# Altium PCB AD8349.PcbDoc
Units mm, origin at the board's own origin, x right, y up, seen from the top; angles counter-clockwise.
Board outline 94.9 x 39.9 mm, 2 copper layers (Top Layer, Bottom Layer); 31 components, 20 nets, 95 pads, 155 vias.
Unrouted connection lines stored in the file: 47.
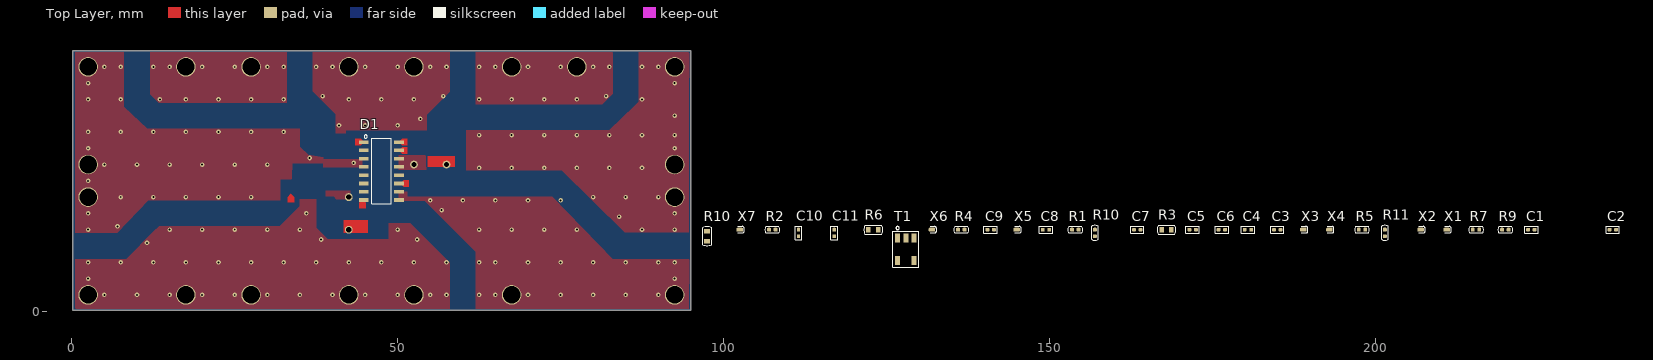
[diagram p0: Top Layer view]
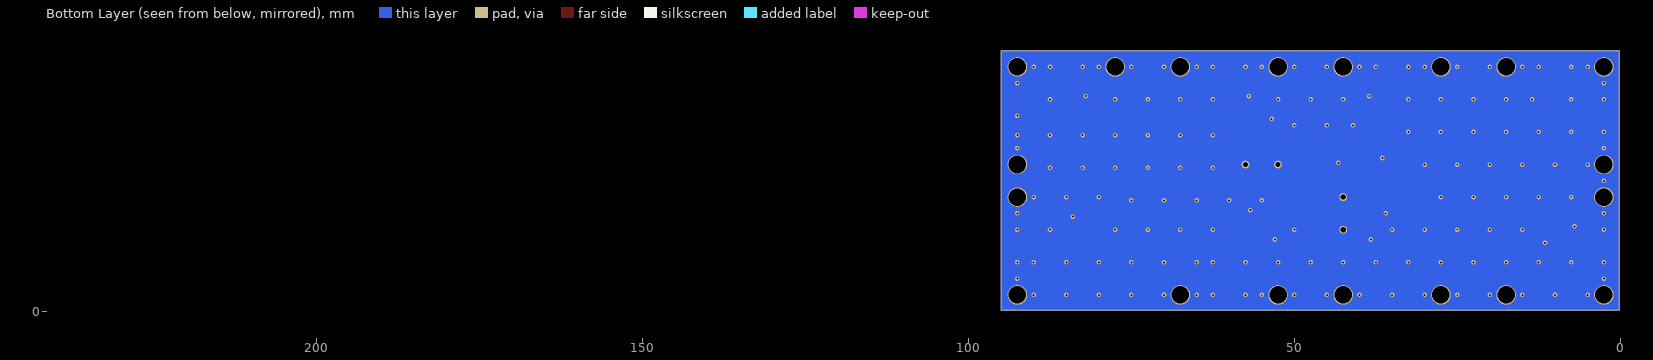
[diagram p1: Bottom Layer view, seen from below]

## Layer stack, top to bottom
Top Solder: solder mask 0.0102, Solder Resist, Dk 3.5
Top Layer: signal copper 0.0356
Dielectric 1: dielectric 0.32, FR-4, Dk 4.8
Bottom Layer: signal copper 0.0356
Bottom Solder: solder mask 0.0102, Solder Resist, Dk 3.5

## Board outline
0.1,0.1 95,0.1 95,40 0.1,40

## Design rules (kind name [scope] priority, off if disabled: settings)
Clearance [All] p1: gap=0.254 ignorepadtopadclearanceinfootprint=FALSE except(0: Arc-Hole Track-Hole SMDPad-Hole THPad-Hole Via-Hole Fill-Hole Poly-Hole Region-Hole Text-Hole)
PolygonConnect [All] p1: connectstyle=Direct reliefconductorwidth=0.254 reliefentries=4 polygonreliefangle="90 Angle" airgapwidth=0.254
RoutingVias [All] p1: holewidth=0.711 width=1.27 viastyle="Through Hole" minholewidth=0.711 minwidth=1.27 maxholewidth=0.711 maxwidth=1.27
SolderMaskExpansion [All] p1: expansion=0.102 istentingtop=FALSE
Width [All] p1: maxlimit=0.254 minlimit=0.254 preferedwidth=0.254
30 further rules are at their usual default settings.

## Components (designator, comment, footprint, x,y, rotation, side; value= is the part's Value field where it differs from the comment)
C1 "100" CAPC1005L 223.999,12.5 r0 top
C2 "100" CAPC1005L 236.499,12.5 r0 top
C3 "100" CAPC1005L 185,12.5 r0 top
C4 "100" CAPC1005L 180.5,12.5 r0 top
C5 "1000" CAPC1005L 172,12.5 r0 top
C6 "0,1 мк" CAPC1005L 176.5,12.5 r0 top
C7 "1000" CAPC1005L 163.5,12.5 r0 top
C8 "1000" CAPC1005L 149.5,12.5 r0 top
C9 "1000" CAPC1005L 141,12.5 r0 top
C10 "0,1 мк" CAPC1005L 111.5,12 r90 top
C11 "1000" CAPC1005L 117,12 r90 top
D1 "AD8349" SOIC127P600X175-16N 47.5,21.5 r0 top
R1 "0" RESC1005L 154,12.5 r0 top
R2 "0" RESC1005L 107.5,12.5 r0 top value="10 к"
R3 "0" RESC1608L 168,12.5 r0 top value=200
R4 "0" RESC1005L 136.5,12.5 r0 top value=200
R5 "200" RESC1005L 198,12.5 r0 top value=0
R6 "0" RESC1608L 123,12.5 r0 top
R7 "0" RESC1005L 215.5,12.5 r0 top
R9 "0" RESC1005L 219.999,12.5 r0 top
R10 "0" RESC1005L 157,12 r90 top
R10 "49,9" RESC1608L 97.5,11.5 r90 top
R11 "0" RESC1005L 201.5,12 r90 top
T1 "ETC1-1-13TR" TRANS_ETC1-1-13TR 128,9.5 r0 top
X1 "СРГ-50-751ФВ" TP0.6X1 211,12.5 r0 top
X2 "СРГ-50-751ФВ" TP0.6X1 207,12.5 r0 top
X3 "СРГ-50-751ФВ" TP0.6X1 189,12.5 r0 top
X4 "СРГ-50-751ФВ" TP0.6X1 193,12.5 r0 top
X5 "СРГ-50-751ФВ" TP0.6X1 145,12.5 r0 top
X6 "СРГ-50-751ФВ" TP0.6X1 132,12.5 r0 top
X7 "СРГ-50-751ФВ" TP0.6X1 102.5,12.5 r0 top

## Footprints (in the part's own frame and the unit in brackets; to place one, negate y for a bottom-side part, rotate by r counter-clockwise, add the part's x,y. Pads: shape width x height; smd on the part's side, far side on the other; paste and mask are expansions set on the pad)
CAPC1005L [mm] "Chip Capacitor, Body 1.0x0.5mm, IPC High Density"
  rrect50% 0.6x0.5 smd: 1(-0.5,0) 2(0.5,0)
  Top Layer pour cut-out: -0.2,0.5 -0.2,-0.5 0.2,-0.5 0.2,0.5
  silkscreen extent -1.02,-0.51 1.02,0.51, body extent -0.55,-0.3 0.55,0.3, height 0.6
RESC1005L [mm] "Chip Resistor, Body 1.1x0.5mm, IPC High Density"
  rrect50% 0.6x0.6 smd: 1(-0.5,0) 2(0.5,0)
  Top Layer pour cut-out: -0.2,0.5 -0.2,-0.5 0.2,-0.5 0.2,0.5
  silkscreen extent -1.15,-0.5 1.15,0.5, body extent -0.55,-0.3 0.55,0.3, height 0.4
RESC1608L [mm] "Chip Resistor, Body 1.6x0.8mm, IPC High Density"
  rect 0.7x0.9 smd: 1(-0.75,0) 2(0.75,0)
  Top Layer pour cut-out: -0.4,0.7 -0.4,-0.7 0.4,-0.7 0.4,0.7
  silkscreen extent -1.45,-0.7 1.45,0.7, body extent -0.85,-0.48 0.85,0.48, height 0.6
SOIC127P600X175-16N [mm] "SOIC, 16-Leads, Body 10,0x4,0mm (max), Pitch 1,27mm, IPC Medium Density"
  rect 1.5x0.55 smd: 1(-2.7,4.445) 2(-2.7,3.175) 3(-2.7,1.905) 4(-2.7,0.635) 5(-2.7,-0.635) 6(-2.7,-1.905) 7(-2.7,-3.175) 8(-2.7,-4.445) 9(2.7,-4.445) 10(2.7,-3.175) 11(2.7,-1.905) 12(2.7,-0.635) 13(2.7,0.635) 14(2.7,1.905) 15(2.7,3.175) 16(2.7,4.445)
  silkscreen extent -2.65,-5 1.5,5.54, body extent -3,-4.95 3,4.95, height 1.54
TP0.6X1 [mm] "Точка пайки переход СРГ-50-751 (плата заштифтована)"
  rrect50% 1x0.6 smd paste-25.4: 1(0,0)
  silkscreen extent -0.3,-0.5 0.7,0.5
TRANS_ETC1-1-13TR [mil] "Surface Mount transformer, 3.8x3.8x2.8"
  rect 30x55 smd: 1(-50,67.5) 2(0,67.5) 3(50,67.5) 4(50,-67.5) 5(-50,-67.5)
  silkscreen extent -79,-108 79,138, body extent -75,-95 75,95, height 112

## Part data
C1 C2 C3 C4: library part i6124B5A087471000001, "Чип-конденсатор", ManufacturerPartNumber="0402 NP0 100 пФ ±5 % 50 В", Power/Voltage="50 В", Tolerance="±5 %", ImKey=i6124B5A087471000001, Name=0402, PCADLibrary=PASSIV.LIB, PCADPattern=C0402, PCADSymbol=C, PCADType=C0402, TKE/TKC={TKE/TKC}, Type=Конденсатор
C5 C7 C8 C9 C11: library part i6124B5A08727A000007, "Чип-конденсатор", ManufacturerPartNumber="0402 C0G 1000 пФ ±5 % 50 В", Power/Voltage="50 В", Tolerance="±5 %", ImKey=i6124B5A08727A000007, Name=0402, PCADLibrary=PASSIV.LIB, PCADPattern=C0402, PCADSymbol=C, PCADType=C0402, Rem="Использовать диэлектрик NP0", TKE/TKC={TKE/TKC}, Type=Конденсатор
C6 C10: library part i6124B5A087044000001, "Чип-конденсатор", ManufacturerPartNumber="0402 X5R 0,1 мкФ ±10 % 10 В", Power/Voltage="10 В", Tolerance="±10 %", ImKey=i6124B5A087044000001, Name=0402, PCADLibrary=PASSIV.LIB, PCADPattern=C0402, PCADSymbol=C, PCADType=C0402, TKE/TKC={TKE/TKC}, Type=Конденсатор
D1: "WIDEBAND DIRECT QUADRATURE MODULATOR, 100 - 6000 MHz", Manufacturer=Hittite, Package=LP4E, ManufacturerPartNumber=AD8349, SymAuthor="Чернова Ю.Г.", Type=Микросхема
R1 R5 R6 R7 R9 R10 R11: library part i6124B5A0876CB00001A, "Чип-резистор", ManufacturerPartNumber="CR0402-J/-000GLF Bourns", Tolerance={Tolerance}, ImKey=i6124B5A0876CB00001A, Name=0402, PCADLibrary=PASSIV.LIB, PCADPattern=R0402, PCADSymbol=R, PCADType=R0402, Type=Резистор
R2: library part i6124B5A0876CB000018, "Чип-резистор", ManufacturerPartNumber="CR0402-JW-103GLF Bourns", Tolerance="±5 %", ImKey=i6124B5A0876CB000018, Name=0402, PCADLibrary=PASSIV.LIB, PCADPattern=R0402, PCADSymbol=R, PCADType=R0402, Type=Резистор
R3 R4: library part i6124B5A0876CB000017, "Чип-резистор", ManufacturerPartNumber="CR0402-JW-201GLF Bourns", Tolerance="±5 %", ImKey=i6124B5A0876CB000017, Name=0402, PCADLibrary=PASSIV.LIB, PCADPattern=R0402, PCADSymbol=R, PCADType=R0402, Type=Резистор
R10: library part i6124B5A08741A00000E, "Чип-резистор", ManufacturerPartNumber="Р1-12-0,1-49,9 Ом ±1 % - Т", Power/Voltage="0,1 Вт", Tolerance="±1 %", ImKey=i6124B5A08741A00000E, Name=0603, TU/GOST="АЛЯР.434110.005 ТУ", Type=Резистор
T1: "Трансформатор", Manufacturer*=Mini-Circuits, Package=SM-22, Power/Voltage*=0.25Вт, ManufacturerPartNumber=ETC1-1-13TR, Type=Трансформатор
X1 X2 X3 X4 X5 X6 X7: "Переход", ManufacturerPartNumber=СРГ-50-751ФВ, TU/GOST="ВР0.364.049 ТУ", Type=Переход

## Free pads (board coordinates)
  round 3 hole 2.7: 1(2.5,2.5) 1(2.5,17.5) 1(2.5,22.5) 1(2.5,37.5) 1(17.5,2.5) 1(17.5,37.5) 1(27.5,2.5) 1(27.5,37.5) 1(42.5,2.5) 1(42.5,37.5) 1(52.5,2.5) 1(52.5,37.5) 1(67.5,2.5) 1(67.5,37.5) 1(77.5,37.5) 1(92.5,2.5) 1(92.5,17.5) 1(92.5,22.5) 1(92.5,37.5)
  round 1.2 hole 0.8: 1(42.5,12.5) 1(42.5,17.5) 1(52.5,22.5) 1(57.5,22.5)

## Via types
v1: diameter 0.7, hole 0.3, Top Layer to Bottom Layer, 155 vias

## Nets (pads, with @x,y where several pads share a name; then routed paths per layer and width w, separated by ;. In a path a pad name is that pad's centre, name@x,y a point inside that pad or via, vN(x,y) a via of type N, cw(c..) or ccw(c..) an arc to the next point about the centre after c; other vN are vias at no path point)
GND: C1.2 C2.2 C3.1 C4.1 C5.2 C6.2 C10.1 C11.1 D1.3 D1.4 D1.9 D1.10 D1.13 D1.14 pad.1@2.5,2.5 pad.1@2.5,17.5 pad.1@2.5,22.5 pad.1@2.5,37.5 pad.1@17.5,2.5 pad.1@17.5,37.5 pad.1@27.5,2.5 pad.1@27.5,37.5 pad.1@42.5,2.5 pad.1@42.5,17.5 pad.1@42.5,37.5 pad.1@52.5,2.5 pad.1@52.5,22.5 pad.1@52.5,37.5 pad.1@67.5,2.5 pad.1@67.5,37.5 pad.1@77.5,37.5 pad.1@92.5,2.5 pad.1@92.5,17.5 pad.1@92.5,22.5 pad.1@92.5,37.5 R1.2 R3.1 R4.1 T1.3
  other v1: 5,2.5 10,2.5 15,2.5 20,2.5 25,2.5 30,2.5 35,2.5 40,2.5 45,2.5 50,2.5 55,2.5 57.5,2.5 62.5,2.5 65,2.5 70,2.5 75,2.5 80,2.5 85,2.5 90,2.5 2.5,5 92.5,5 2.5,7.5 7.5,7.5 12.5,7.5 17.5,7.5 22.5,7.5 27.5,7.5 32.5,7.5 37.5,7.5 42.5,7.5 47.5,7.5 52.5,7.5 57.5,7.5 62.5,7.5 65,7.5 70,7.5 75,7.5 80,7.5 85,7.5 90,7.5 92.5,7.5 11.536,10.464 38.25,11 38.25,11 53,11 2.5,12.5 15,12.5 20,12.5 25,12.5 30,12.5 35,12.5 50,12.5 62.5,12.5 67.5,12.5 72.5,12.5 77.5,12.5 87.5,12.5 92.5,12.5 7,13 84,14.5 2.5,15 36,15 92.5,15 56.75,15.5 55,17 60,17 65,17 70,17 75,17 7.5,17.5 12.5,17.5 17.5,17.5 22.5,17.5 27.5,17.5 80,17.5 85,17.5 90,17.5 2.5,20 62.5,22 67.5,22 72.5,22 77.5,22 82.5,22 87.5,22 5,22.5 10,22.5 15,22.5 20,22.5 25,22.5 30,22.5 43.25,22.75 36.5,23.5 2.5,25 92.5,25 62.5,27 67.5,27 72.5,27 77.5,27 82.5,27 87.5,27 92.5,27 2.5,27.5 7.5,27.5 12.5,27.5 17.5,27.5 22.5,27.5 27.5,27.5 32.5,27.5 41,28.5 45,28.5 50,28.5 53.5,29.5 92.5,30 2.5,32.5 7.5,32.5 13.5,32.5 17.5,32.5 22.5,32.5 27.5,32.5 32.5,32.5 42.5,32.5 47.5,32.5 52.5,32.5 62.5,32.5 67.5,32.5 72.5,32.5 77.5,32.5 87.5,32.5 38.5,33 57,33 82,33 2.5,35 92.5,35 5,37.5 7.5,37.5 12.5,37.5 15,37.5 20,37.5 25,37.5 30,37.5 32.5,37.5 37.5,37.5 40,37.5 45,37.5 50,37.5 55,37.5 57.5,37.5 62.5,37.5 65,37.5 70,37.5 75,37.5 80,37.5 82.5,37.5 87.5,37.5 90,37.5
NetC1_1: C1.1 D1.1 R7.2
NetC2_1: C2.1 D1.16 R9.1
NetC3_2: C3.2 D1.2 R5.2
NetC4_2: C4.2 D1.15 R11.1
NetC5_1: C5.1 D1.12 R10.1@157,11.5
NetC7_1: C7.1 R3.2 T1.4
NetC7_2: C7.2 D1.5
NetC8_1: C8.1 R4.2 T1.5
NetC8_2: C8.2 D1.6
NetC9_1: C9.1 D1.11
NetC9_2: C9.2 X5.1
NetC11_2: C11.2 D1.7 R6.1
NetD1_8: D1.8 R2.1 R10.2@97.5,12.25 X7.1
NetR1_1: R1.1 T1.1 X6.1
NetR5_1: R5.1 X3.1
NetR7_1: R7.1 X1.1
NetR9_2: R9.2 X2.1
NetR11_2: R11.2 X4.1
VPOS: C6.1 C10.2 pad.1@42.5,12.5 pad.1@57.5,22.5 R2.2 R6.2 R10.2@157,12.5
pads on no net: R10.1@97.5,10.75 T1.2

## Polygon pours and split planes (outlines as drawn)
GND on Top Layer "Bottom Layer-No Net" (solid, pour order 10): 37,39.7 37,33.728 37.914,32.814 40.5,30.228 40.5,27.275 42,27.275 42,27.75 52.312,27.75 54.5,27.75 54.5,30.175 58,33.675 58,39.7
GND on Top Layer "Bottom Layer-No Net" (solid, pour order 14): 39,18.5 42.7,18.5 42.7,17.2 42.5,17.2 42.1,17.2 40.6,17.2 40.2,17.6 39,17.6
GND on Top Layer "Bottom Layer-No Net" (solid, pour order 2): 0.5,8 0.5,0.5 0.6,0.4 58,0.4 58,7.422 51.922,13.5 48.65,13.5 48.65,11 39.3,11 37.5,12.8 37.5,17.2 35,17.2 35,16.1 31.9,13 13.4,13 12.6,12.272 8.328,8
GND on Top Layer "Bottom Layer-No Net" (solid, pour order 0): 0.5,39.75 8,39.75 8,31.402 11.598,28 35,28 35,25.25 36.25,24 38.6,23.65 38.6,23.325 42.269,23.325 44.586,23.325 44.586,22.1 43.9,22.1 42.8,22.1 38.6,22.1 38.6,22.7 33.8,22.7 33.725,20.566 33.755,20.25 33.201,20.277 32,20.277 32,17 30,17 11.75,17 7,12 0.5,12 0.5,21.25 0.5,24.5 0.5,26.75 0.5,27.75 0.5,29.367 0.5,33.25 0.513,36.94 0.5,37.25
GND on Top Layer "Bottom Layer-No Net" (solid, pour order 6): 94.725,39.7 87,39.7 87,32.135 86.349,31.5 82.5,27.75 82.35,27.75 60.5,27.75 60.5,21.598 75.2,21.598 84.814,12.1 94.7,12.1 94.7,32
GND on Top Layer "Bottom Layer-No Net" (solid, pour order 4): 62,0.4 62,9.078 54.164,16.914 50.341,16.914 50.2,17.055 50.2,18.325 51.5,18.325 51.5,17.595 53.095,17.595 73.75,17.595 82.981,8 94.747,8 94.7,0.4
GND on Top Layer "Bottom Layer-No Net" (solid, pour order 16): 50.2,23.9 50.2,21.7 54.4,21.7 54.4,23.9
GND on Top Layer "Bottom Layer-No Net" (solid, pour order 12): 12,39.725 12,36.1 12,33.325 13.325,32 33,32 33,39.725
GND on Top Layer "Bottom Layer-No Net" (solid, pour order 8): 83,39.725 83,33.328 81.375,31.75 80.55,31.75 62,31.75 62,39.7

## Other copper
Top Layer:
  region net NetR7_1: 33.6,18 33.1,17.5 33.1,16.7 34.1,16.7 34.1,17.5
  region net NetD1_8: 44.6,17.1 44.1,16.6 44.1,15.8 45.1,15.8 45.1,16.6
  region net NetC9_1: 50.4,19.6 50.9,19.1 51.7,19.1 51.7,20.1 50.9,20.1
  region net NetC4_2: 50.2,24.675 50.7,24.175 51.5,24.175 51.5,25.175 50.7,25.175
  region net NetC2_1: 50.2,25.945 50.7,25.445 51.5,25.445 51.5,26.445 50.7,26.445
  region net NetC1_1: 44.8,25.945 44.3,26.445 43.5,26.445 43.5,25.445 44.3,25.445
  region net VPOS: 41.75,12 45.4,12 45.4,13.95 41.75,13.95
  region net VPOS: 54.6,22.15 58.75,22.15 58.75,23.75 56.125,23.75 54.6,23.75
Bottom Layer:
  rectangle net GND: 0.1,0.1 95,39.95

## Silkscreen, mask and mechanical layers (free items; w line width, h text height)
Top Solder:
  region: 95,0.2 95,39.95 90,39.95 90,0.2
  region: 5.1,0 5.1,39.75 0.1,39.75 0.1,0
  region: 95.1,5.1 0.2,5.1 0.2,0.1 95.1,0.1
  rectangle: 0.1,35.1 95,40.1
Bottom Solder:
  rectangle: 0.1,0.1 95,40